# Altium PCB BFR92A.PcbDoc
Units mm, origin at the board's own origin, x right, y up, seen from the top; angles counter-clockwise.
Board outline 30 x 14 mm, 2 copper layers (Top Layer, Bottom Layer); 16 components, 9 nets, 38 pads, 0 vias.
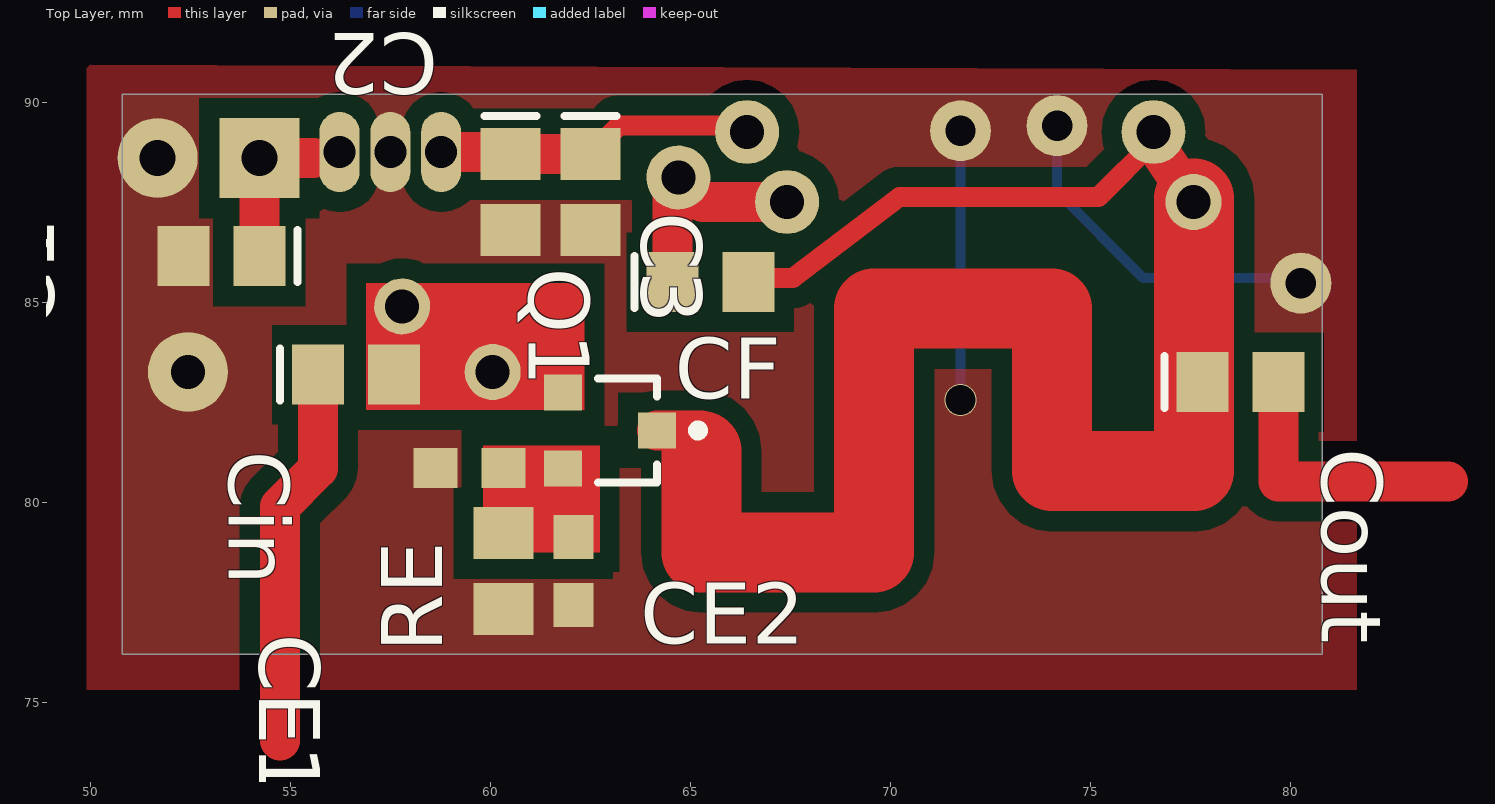
[diagram p0: Top Layer view]
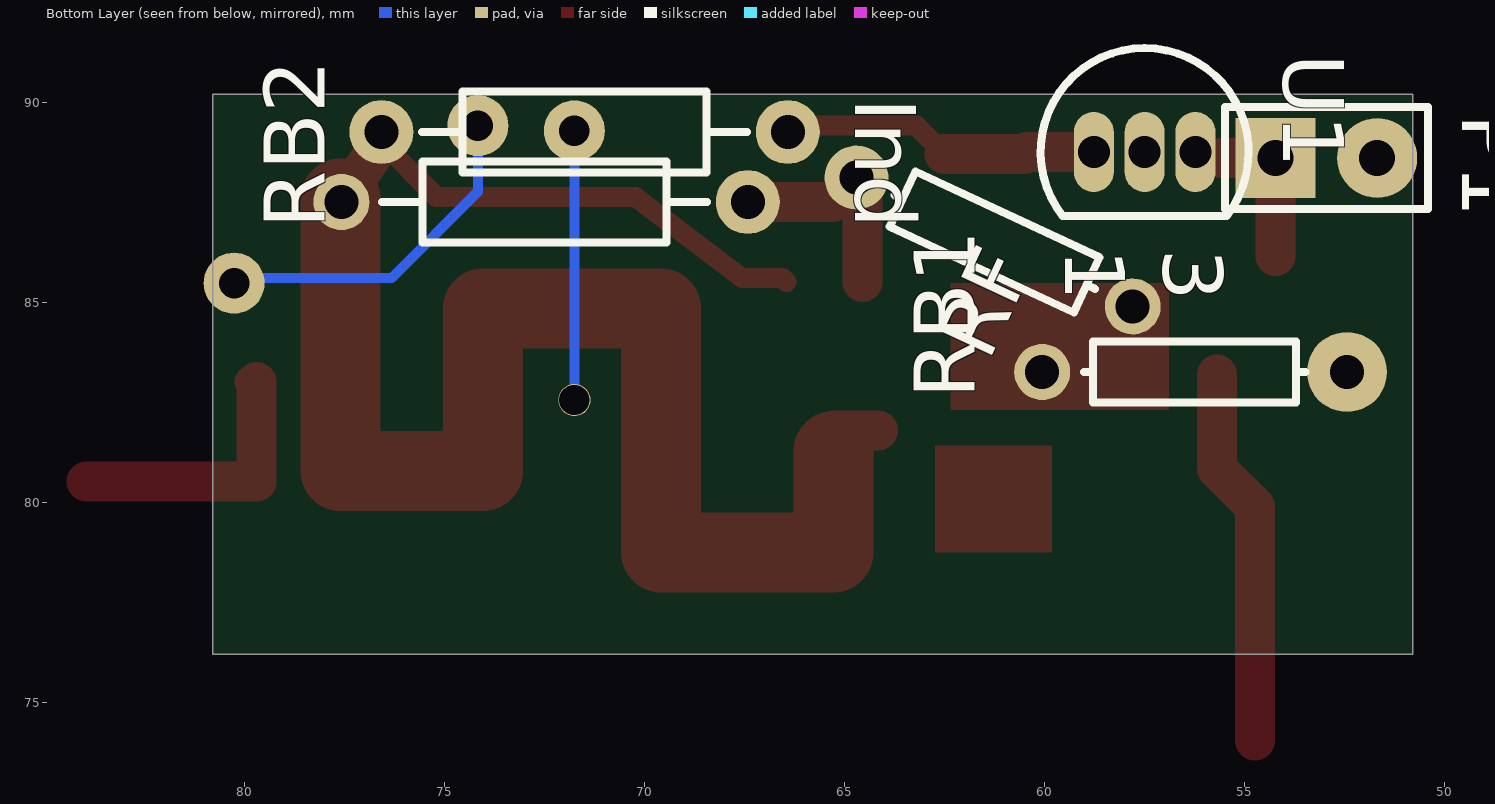
[diagram p1: Bottom Layer view, seen from below]

## Layer stack, top to bottom
Top Layer: signal copper 0.0356
Dielectric: dielectric 0.32, FR-4, Dk 4.8
Bottom Layer: signal copper 0.0356

## Board outline
50.8,76.2 80.8,76.2 80.8,90.2 50.8,90.2

## Design rules (kind name [scope] priority, off if disabled: settings)
Clearance [All] p1: gap=0.5
ComponentClearance [All] p1: gap=0.254 collisioncheckmode=3 verticalgap=0.254
PolygonConnect [All] p1: connectstyle=Direct reliefconductorwidth=0.254 reliefentries=4 polygonreliefangle="90 Angle"
RoomDefinition Ampli_ancha [InComponentClass('Ampli_ancha')] p1: confinementstyle=ConfineIn formatcopy=TRUE lockcomponents=FALSE outline 45.974,73.152 84.582,73.152 84.582,92.583 45.974,92.583
RoutingVias [All] p1: holewidth=0.8 width=2 viastyle="Through Hole" minholewidth=0.711 minwidth=1.27 maxholewidth=1 maxwidth=2
SolderMaskExpansion [All] p1: expansion=0.102
TestPointUsage [All] p1: valid=0 allowmultiple=FALSE
Testpoint [All] p1: side=15 testpointundercomponent=TRUE minsize=1.016 maxsize=2.54 preferedsize=1.524 minholesize=0 maxholesize=1.016 preferedholesize=0.813 testpointgrid=0.025 style=1023 order=0123456789
Width [All] p1: maxlimit=5 minlimit=2539.975 preferedwidth=1 toplayer_minwidth=0 bottomlayer_minwidth=0
18 further rules are at their usual default settings.

## Components (designator, comment, footprint, x,y, rotation, side; value= is the part's Value field where it differs from the comment)
C1 "Cap Pol3" C0805 53.275,86.15 r180 top
C2 "Cap Pol3" C0805 60.5,87.75 r270 top
C3 "Cap Pol3" C0805 62.5,87.75 r270 top
CE1 "Cap Semi" 1608[0603] 59.475,80.85 r0 top
CE2 "Cap Semi" 1608[0603] 62.075,78.275 r90 top
CF "Cap Pol3" C0805 65.5,85.5 r0 top
Cin "Cap Pol3" C0805 56.642,83.185 r0 top
Cout "Cap Pol3" C0805 78.75,83 r0 top
Ind "Res2" AXIAL-0.4#1 71.5,89.25 r180 bottom
P1 "Alimentacion" HDR1X2 54.225,88.6 r180 bottom
Q1 "BFR92A" SOT23 62.992,81.788 r270 top
RB1 "Res1" AXIAL-0.3#1 56.25,83.25 r0 bottom
RB2 "Res1" AXIAL-0.4#2 72.5,87.5 r0 bottom
RE "Res Semi" 2012[0805] 60.325,78.275 r90 top
RF "Res1" AXIAL-0.3#2 61.25,86.5 r25 bottom
U1 "MC78L05CP" 29-04 57.5,88.75 r270 bottom

## Footprints (in the part's own frame and the unit in brackets; to place one, negate y for a bottom-side part, rotate by r counter-clockwise, add the part's x,y. Pads: shape width x height; smd on the part's side, far side on the other; paste and mask are expansions set on the pad)
29-04 [mm] "TO, Flat Index; 3 In-Line, Axial Leads; Body Dia. 4.8mm; Leads 0.48 x 0.5 mm (max)"
  oval 2x1 hole 0.8: 1(0,-1.27) 2(0,0) 3(0,1.27)
  silkscreen extent -2.6,-2.6 1.6,2.6
1608[0603] [mm] "Chip Capacitor; Body 1.6 x 0.8 mm (LxW typ)"
  rect 1.1x1 smd: 1(-0.85,0) 2(0.85,0)
2012[0805] [mm] "Chip Resistor; Body 2.0 x 1.3 mm (LxW typ)"
  rect 1.3x1.5 smd: 1(-0.95,0) 2(0.95,0)
AXIAL-0.3#1 [mm] "Resistor; 2 Leads"
  round 2 hole 0.85: 1(-3.81,0)
  round 1.4 hole 0.85: 2(3.81,0)
  silkscreen extent -2.77,-0.76 2.77,0.76
AXIAL-0.3#2 [mm] "Resistor; 2 Leads"
  round 1.4 hole 0.85: 1(-3.81,0)
  round 1.6 hole 0.85: 2(3.81,0)
  silkscreen extent -2.77,-0.76 2.77,0.76
AXIAL-0.4#1 [mm] "Resistor; 2 Leads"
  round 1.6 hole 0.85: 1(-5.08,0) 2(5.08,0)
  silkscreen extent -4.06,-1.02 4.06,1.02
AXIAL-0.4#2 [mm] "Resistor; 2 Leads"
  round 1.6 hole 0.85: 1(-5.08,0)
  round 1.4 hole 0.85: 2(5.08,0)
  silkscreen extent -4.06,-1.02 4.06,1.02
C0805 [mm] "Chip Capacitor; Body 2.0 x 1.2 mm (LxW typ)"
  rect 1.3x1.5 smd: 1(-0.95,0) 2(0.95,0)
  silkscreen extent -1.9,-0.65 -1.9,0.65
HDR1X2 [mm] "Connector; Header; 2 Position"
  rect 2x2 hole 0.9: 1(0,0)
  round 2 hole 0.9: 2(2.54,0)
  silkscreen extent -1.27,-1.27 3.81,1.27
SOT23 [mm] "SOT-23; 3 Leads; Body 3.1 x 2.5 mm, inc. leads (LxW max), Alternate Lead Configuration"
  rect 0.9x0.95 smd: 1(0,1.175) 2(0.95,-1.175) 3(-0.95,-1.175)
  silkscreen extent -1.3,-0.3 1.3,2.33

## Part data
C1 C2: library part Cap2, "Capacitor"
C3 CF Cin Cout: "Polarized Capacitor (Surface Mount)"
CE1 CE2: "Capacitor (Semiconductor SIM Model)"
Ind RB1 RB2 RF: "Resistor"
P1: library part "Header 2", "Header, 2-Pin"
Q1: "NPN 5 GHz Wideband Transistor"
RE: "Semiconductor Resistor"
U1: "3-Terminal Low-Current Positive Fixed Voltage Regulator"

## Free pads (board coordinates)
  round 0.8 hole 0.762: 0(71.755,82.55)
  round 1.524 hole 0.762: 1(71.755,89.281) 2(74.168,89.408) 3(80.264,85.471)

## Nets (pads, with @x,y where several pads share a name; then routed paths per layer and width w, separated by ;. In a path a pad name is that pad's centre, name@x,y a point inside that pad or via, vN(x,y) a via of type N, cw(c..) or ccw(c..) an arc to the next point about the centre after c; other vN are vias at no path point)
5V: C2.1 C3.1 Ind.2 U1.1 | length 8.1
  Top Layer w0.5: C3.1 63.208,89.408 66.012,89.408 Ind.2@66.42,89
  Top Layer w1: U1.1 60.45,88.75 C2.1 C3.1
BASE: Cin.2 Q1.3 RB1.2 RF.1
COLECTOR: CF.2 Cout.1 Ind.1 Q1.1 RB2.2 | length 46.7
  Top Layer w0.5: CF.2 66.548,85.598 67.564,85.598 70.231,87.63 75.21,87.63 Ind.1@76.58,89
  Top Layer w1: Q1.1 65.278,81.788 65.278,81.28 ; Ind.1@76.58,89 RB2.2
  Top Layer w2: 65.278,81.28 65.278,78.74 69.596,78.74 69.596,84.836 74.041,84.836 74.041,80.772 77.597,80.772 RB2.2@77.597,87.593
EMISOR: CE1.2 CE2.2 Q1.2 RE.2
GND: C1.2 C2.2 C3.2 CE1.1 CE2.1 P1.2 pad.0 pad.1 pad.2 pad.3 RB1.1 RE.1 U1.2 | length 15.5
  Bottom Layer w0.254: pad.0 pad.1 ; pad.2 74.168,87.757 76.327,85.598 79.629,85.598 79.756,85.725 pad.3
NetC1_1: C1.1 P1.1 U1.3 | length 3.8
  Top Layer w1: C1.1 P1.1@54.225,88.625 ; P1.1 55.575,88.6
NetCF_1: CF.1 RB2.1 RF.2 | length 5.6
  Top Layer w1: CF.1 64.55,87.957 RF.2 65.313,87.5 RB2.1
NetCin_1: Cin.1 | length 9.5
  Top Layer w1: 54.737,74.041 54.737,79.883 55.692,80.838 Cin.1
NetCout_2: Cout.2 | length 7
  Top Layer w0.8: Cout.2@79.629,83 Cout.2@79.85,83
  Top Layer w1: Cout.2 79.7,80.518 83.947,80.518

## Polygon pours and split planes (outlines as drawn)
GND on Top Layer (solid, remove dead copper): 49.911,90.932 49.911,75.311 81.661,75.311 81.661,90.805

## Other copper
Top Layer:
  rectangle net BASE: 56.896,82.296 62.357,85.471
  rectangle net EMISOR: 59.817,78.74 62.738,81.407
Multi-Layer:
  lines w0.254: 53.848,54.229 53.848,64.643

## Silkscreen, mask and mechanical layers (free items; w line width, h text height)
Drill Drawing:
  text ".LEGEND" at 85.88,81.28 h1.52
  text "Drill Drawing." at 85.88,78.74 h1.52

## Text inside footprints (layer, text, board x,y; h text height)
U1: Bottom Overlay "3" at 57.033,86.329 h1.5 r90; Bottom Overlay "1" at 59.479,86.329 h1.5 r90